# EAGLE board AtMEGA32u4-uSD-AddON (EAGLE 5.11)
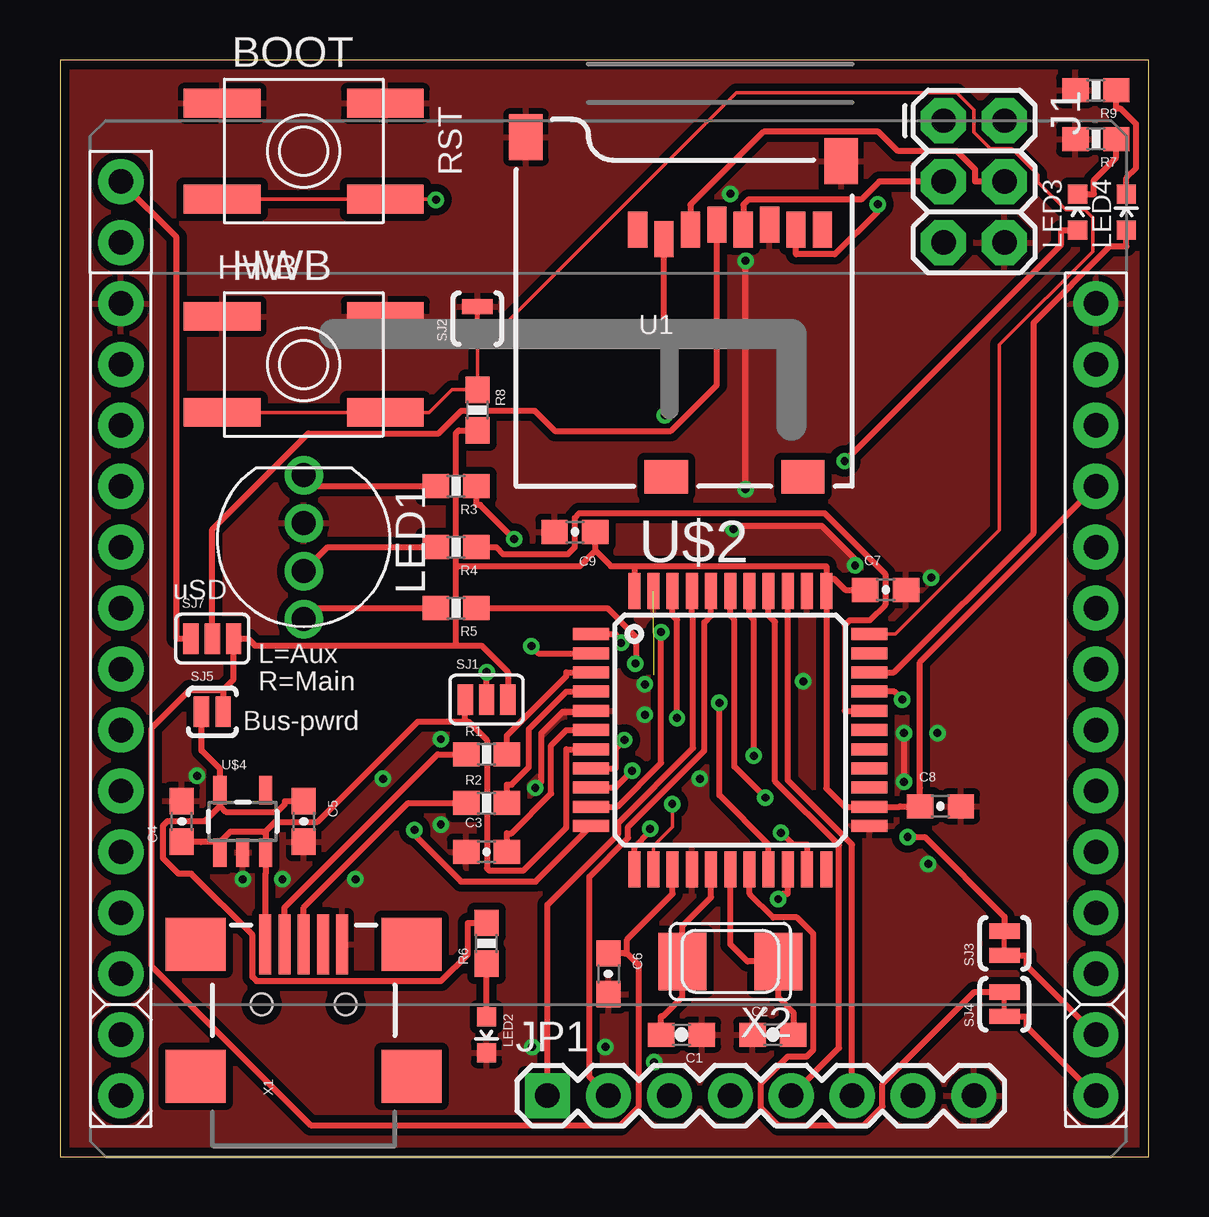
[diagram p0: board, top side]
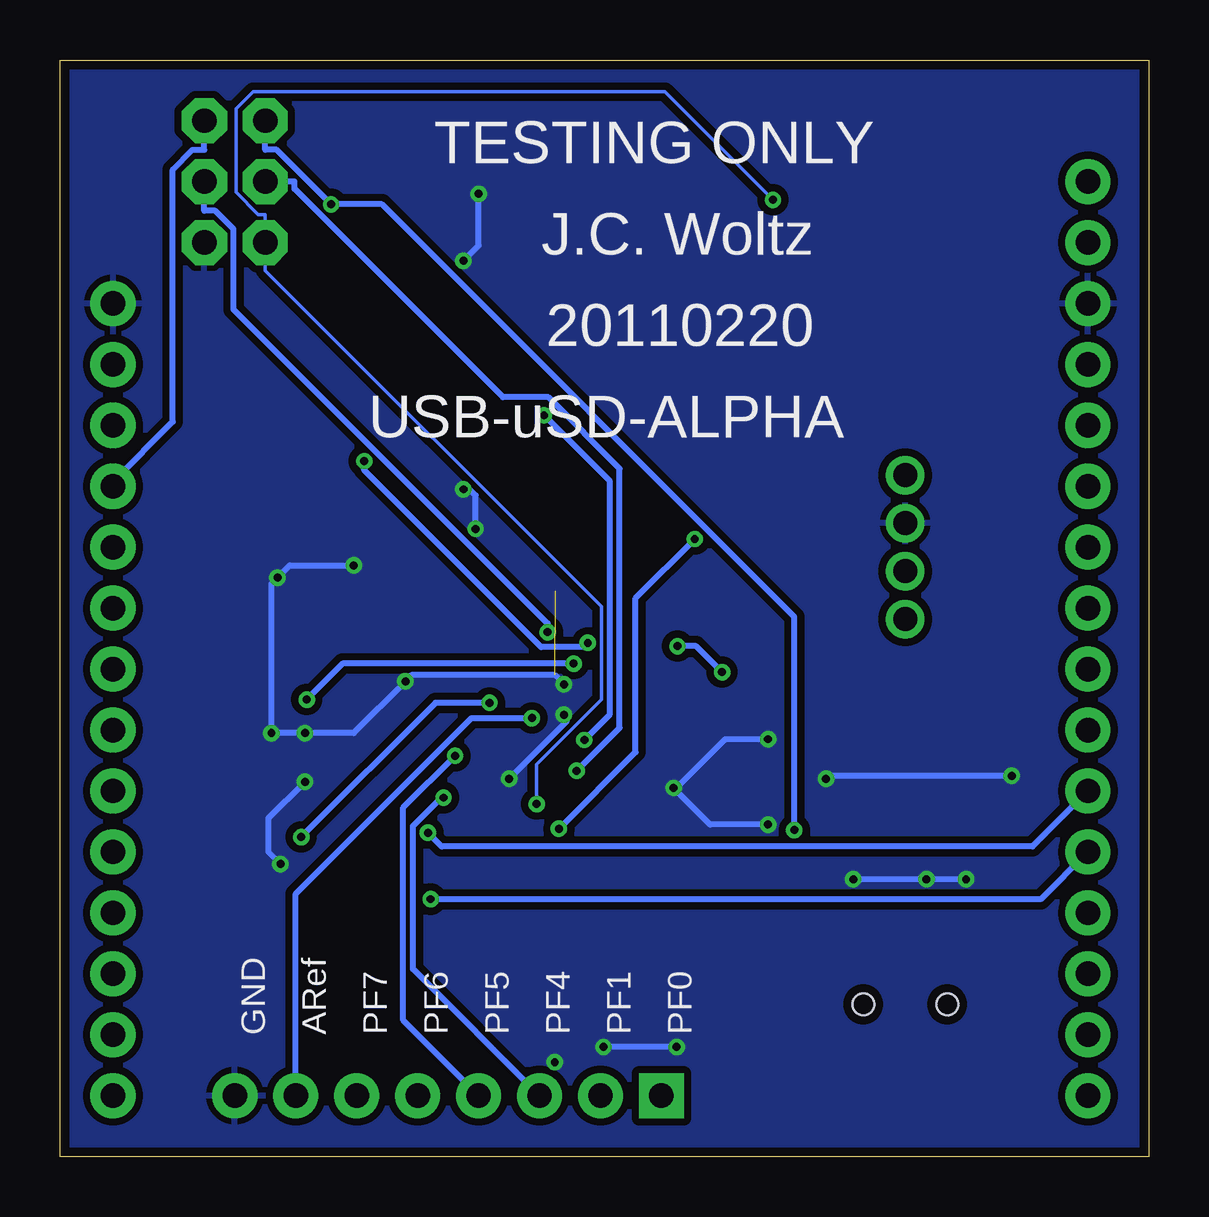
[diagram p1: board, bottom side, seen from below]

Size 45.39 x 45.71 mm. Coordinates in mm from the lower left corner, seen from the top.
Outline: 0,0 45.39,0 45.39,45.71 0,45.71 0,0
Copper layers (1*16): Top 0.0356mm / dielectric 1.5011mm / Bottom 0.0356mm
Design rules "LaenPCBOrder-JCModified": minimum track width 6mil, minimum drill 13mil, track to track 6mil, track to pad 6mil, pad to pad 6mil, via to via 6mil, smd to smd 6mil, copper to edge 15mil, drill to drill 6mil, minimum pad ring 12mil, minimum via ring 7mil, stop-mask expansion 4mil, vias tented up to drill 25mil, thermal gap 10mil
Net classes: 0 default: width 0.254 mm; 1 smallsignal: width 0.152 mm; 2 bigsignal: width 0.356 mm

## Footprints (pad centres in the part's own frame; a part is rotated, then mirrored left to right if it is on the bottom)
EVQ-Q2 = smd 3.2 x 1.2: A -3.4,-2; A' 3.4,-2; B -3.4,2; B' 3.4,2
0603-CAP = smd 1.1 x 1: 1 -0.85,0; 2 0.85,0
2X3 = drill 1.016 pad 1.88 octagon: 1 0,0; 2 0,2.54; 3 2.54,0; 4 2.54,2.54; 5 5.08,0; 6 5.08,2.54
1X08 = drill 1.016 pad 1.88 square: 1 0,0 | drill 1.016 pad 1.88 round: 2 2.54,0; 3 5.08,0; 4 7.62,0; 5 10.16,0; 6 12.7,0; 7 15.24,0; 8 17.78,0
LED-TRICOLOR-THROUGHHOLE = drill 1 round: BLU 1,0; GND -1,0; GRN 3,0; RED -3,0
LED-0603 = smd 0.8 x 0.8: A 0,-0.75; C 0,0.75
0603-RES = smd 1.1 x 1: 1 -0.85,0; 2 0.85,0
SJ_3_PASTE2&3 = smd 0.635 x 1.27: 1 -0.889,0; 2 0,0; 3 0.889,0
SJ_2S-TRACE = smd 0.635 x 1.27: 1 -0.508,0; 2 0.508,0
SJ_2S-NO = smd 0.635 x 1.27: 1 -0.45,0; 2 0.45,0
SJ_3_PASTE1&2 = smd 0.635 x 1.27: 1 -0.889,0; 2 0,0; 3 0.889,0
MICRO-SD-SOCKET-PP = smd 0.8 x 1.5: 1 -8.94,10.7; 2 -7.84,10.3; 3 -6.74,10.7; 4 -5.64,10.9; 5 -4.54,10.7; 6 -3.44,10.9; 7 -2.34,10.7; 8 -1.24,10.7 | smd 1.8 x 1.4: CD1 -2.05,0.4; CD2 -7.75,0.4 | smd 1.4 x 1.9: GND1 -13.6,14.55; GND3 -0.45,13.55
SYNSJ-STACK = drill 1.016 pad 1.88 round: G0 0,-7.62; G1 0,-10.16; G2 0,-12.7; G3 0,-15.24; G4 0,-17.78; G5 0,-20.32; G6 0,-22.86; G7 0,-25.4; G8 0,-27.94; G9 0,-30.48; G10 0,-33.02; G11 40.64,-33.02; G12 40.64,-30.48; G13 40.64,-27.94; G14 40.64,-25.4; G15 40.64,-22.86; G16 40.64,-20.32; G17 40.64,-17.78; G18 40.64,-15.24; GND 0,-5.08; GND1 40.64,-5.08; R1 0,0; R2 0,-2.54; R3 0,-35.56; R4 0,-38.1; R5 40.64,-38.1; R6 40.64,-35.56; RESERVED 40.64,-10.16; RESET 40.64,-7.62; VCC 40.64,-12.7
TQFP44 = smd 1.5 x 0.5: 1 -5.8,4; 2 -5.8,3.2; 3 -5.8,2.4; 4 -5.8,1.6; 5 -5.8,0.8; 6 -5.8,0; 7 -5.8,-0.8; 8 -5.8,-1.6; 9 -5.8,-2.4; 10 -5.8,-3.2; 11 -5.8,-4; 23 5.8,-4; 24 5.8,-3.2; 25 5.8,-2.4; 26 5.8,-1.6; 27 5.8,-0.8; 28 5.8,0; 29 5.8,0.8; 30 5.8,1.6; 31 5.8,2.4; 32 5.8,3.2; 33 5.8,4 | smd 0.5 x 1.5: 12 -4,-5.8; 13 -3.2,-5.8; 14 -2.4,-5.8; 15 -1.6,-5.8; 16 -0.8,-5.8; 17 0,-5.8; 18 0.8,-5.8; 19 1.6,-5.8; 20 2.4,-5.8; 21 3.2,-5.8; 22 4,-5.8; 34 4,5.8; 35 3.2,5.8; 36 2.4,5.8; 37 1.6,5.8; 38 0.8,5.8; 39 0,5.8; 40 -0.8,5.8; 41 -1.6,5.8; 42 -2.4,5.8; 43 -3.2,5.8; 44 -4,5.8
SOT23-5 = smd 0.55 x 1.2: 1 -0.95,-1.3; 2 0,-1.3; 3 0.95,-1.3; 4 0.95,1.3; 5 -0.95,1.3
USB-MINIB = smd 2.5 x 0.5: D+ 2.5,0; D- 2.5,0.8; GND 2.5,-1.6; ID 2.5,-0.8; VBUS 2.5,1.6 | smd 2.2 x 2.5: GND@1 -3,-4.5; GND@2 -3,4.5; GND@3 2.5,4.5; GND@4 2.5,-4.5 | hole 0.9: 0,1.75; 0,-1.75
NX5032 = smd 2 x 2.4: P$1 2,0; P$2 -2,0

## Placement (x,y rotation side)
BOOT  EVQQ2  [EVQ-Q2]  10.16,41.91 0 top
C1  22pF  [0603-CAP]  25.91,5.08 180 top
C2  22pF  [0603-CAP]  29.72,5.08 0 top
C3  1uF  [0603-CAP]  17.78,12.7 0 top
C4  1uF  [0603-CAP]  5.08,13.97 90 top
C5  1uF  [0603-CAP]  10.16,13.97 270 top
C6  1uF  [0603-CAP]  22.86,7.62 270 top
C7  1uF  [0603-CAP]  34.42,23.62 0 top
C8  1uF  [0603-CAP]  36.7,14.6 0 top
C9  1uF  [0603-CAP]  21.46,26.03 180 top
HWB  EVQQ2  [EVQ-Q2]  10.16,33.02 0 top
J1  AVR_SPI_PRG_6PTH  [2X3]  36.83,43.18 270 top
JP1  [1X08]  20.32,2.54 0 top
LED1  rgb  [LED-TRICOLOR-THROUGHHOLE]  10.16,25.4 270 top
LED2  GREEN  [LED-0603]  17.78,5.08 180 top
LED3  RED  [LED-0603]  42.42,39.37 0 top
LED4  RED  [LED-0603]  44.45,39.37 0 top
R1  22  [0603-RES]  17.78,16.76 0 top
R2  22  [0603-RES]  17.78,14.73 0 top
R3  220  [0603-RES]  16.51,27.94 180 top
R4  220  [0603-RES]  16.51,25.4 180 top
R5  220  [0603-RES]  16.51,22.86 180 top
R6  1K  [0603-RES]  17.78,8.89 90 top
R7  1K  [0603-RES]  43.18,42.42 180 top
R8  10K  [0603-RES]  17.4,31.12 270 top
R9  1K  [0603-RES]  43.18,44.45 180 top
SJ1  [SJ_3_PASTE2&3]  17.78,19.05 0 top
SJ2  HWB  [SJ_2S-TRACE]  17.4,34.93 90 top
SJ3  SOLDERJUMPERTRACE  [SJ_2S-TRACE]  39.37,8.89 90 top
SJ4  SOLDERJUMPERTRACE  [SJ_2S-TRACE]  39.37,6.35 90 top
SJ5  SOLDERJUMPERNO  [SJ_2S-NO]  6.35,18.54 0 top
SJ7  [SJ_3_PASTE1&2]  6.35,21.59 0 top
U1  USD-SOCKETNEW  [MICRO-SD-SOCKET-PP]  33.02,27.94 0 top
U$1  SYNAPSE-SJ-STCKINGD30-1600  [SYNSJ-STACK]  2.54,40.64 0 top
U$2  ATMEGA32U4-AU  [TQFP44]  27.94,17.78 0 top
U$4  MCP1802  [SOT23-5]  7.62,13.97 0 top
X1  USBSMD  [USB-MINIB]  10.16,6.35 90 top
X2  NX5032GA  [NX5032]  27.94,8.13 180 top

## Library data of the parts
BOOT HWB = adaprog
C1 C2 J1 JP1 LED1 SJ1-SJ5 SJ7 = SparkFun
C3-C9 LED2-LED4 R1-R9 U$1 U$4 X1 = 0_jc-custom
U1 = 0_jc-modified
U$2 X2 = adafruit

## Nets
AREF-7: JP1.7 U$2.42
GND: BOOT.B BOOT.B' C1.1 C2.1 C3.1 C4.2 C5.2 C6.2 C7.2 C8.2 C9.2 HWB.B HWB.B' J1.6 JP1.8 LED1.GND LED2.C R7.2 R9.2 SJ2.2 U1.6 U1.GND1 U1.GND3 U$1.GND U$1.GND1 U$2.5 U$2.15 U$2.23 U$2.35 U$2.43 U$4.2 X1.GND
HWB [smallsignal]: HWB.A HWB.A' R8.1 SJ2.1 U$2.33
MISO: J1.1 U1.7 U$2.11
MOSI: J1.4 U1.3 U$2.10
MVOUT: C5.1 R6.2 SJ5.1 U$4.5
N$3: SJ7.2 U1.4
N$4: C3.2 U$2.6
N$6: LED1.RED R3.2
N$7: LED1.BLU R4.2
N$8: LED2.A R6.1
N$9: LED4.C R9.1
N$10: LED3.C R7.1
N$11: SJ3.1 U$1.R6
N$12: LED1.GRN R5.2
N$13: SJ4.1 U$1.R5
N$38: U1.CD1
N$40: U1.CD2
PB4: U$2.28
PB5-BLU: R4.1 U$2.29
PB6-GRN: R5.1 U$2.30
PB7-RED: R3.1 U$2.12
PC6-LED4: LED4.A U$2.31
PC7: U$2.32
PD4: U$2.25
PD5: U$2.22
PD6: U$2.26
PD7: U$2.27
PE6-LED3: LED3.A U$2.1
PF0-1: JP1.1 U$2.41
PF1-2: JP1.2 U$2.40
PF4-3: JP1.3 U$2.39
PF5-4: JP1.4 U$2.38
PF6-5: JP1.5 U$2.37
PF7-6: JP1.6 U$2.36
RESET: U$1.RESET
RST [smallsignal]: BOOT.A BOOT.A' J1.5 U$2.13
RX1: U$1.G7 U$2.21
SCK: J1.3 U1.5 U$2.9
SCL: SJ4.2 U$2.18
SD_CS: U1.2 U$2.8
SDA: SJ3.2 U$2.19
TX1: U$1.G8 U$2.20
UD+: R2.2 U$2.4
UD-: R1.2 U$2.3
UDM: R1.1 X1.D-
UDP: R2.1 X1.D+
UVCC: SJ1.2 U$2.2
VBUS: C4.1 SJ1.1 U$2.7 U$4.1 U$4.3 X1.VBUS
VCC3: C6.1 C7.1 C8.1 C9.1 J1.2 R8.2 SJ1.3 SJ5.2 SJ7.3 U$1.VCC U$2.14 U$2.24 U$2.34 U$2.44
VCC3A: SJ7.1 U$1.R1
XTAL1: C2.2 U$2.17 X2.P$2
XTAL2: C1.2 U$2.16 X2.P$1

## Tracks (layer width: path | path; a pad name or v marks a point on that pad's centre or on a via)
AREF-7  (via drill 0.33 pad 0.69)
  Top 0.254: U$2.42 25.54,22.55 25.72,22.37 v25.72,18.27
  Bottom 0.254: v25.72,18.27 28.24,18.27 35.56,10.96 JP1.7
GND  (via drill 0.33)  (1 unrouted)
  Top 0.254: v19.81,15.37 20.07,15.62 20.07,17.65 20.95,18.54 22.1,18.54 U$2.5 | v35.18,17.65 v35.18,15.62 | v33.15,24.64 33.15,24.89 31.75,26.29 28.07,26.29 v28.07,26.16 | v28.57,27.81 v28.57,37.34
  Bottom 0.254: v15.88,13.84 18.29,13.84 v19.81,15.37 19.68,15.37 17.65,17.4 v15.88,17.4 | v7.62,11.56 v9.27,11.56 v12.32,11.56 | v19.68,4.57 v22.73,4.57 | v13.46,15.75 13.33,15.87 v5.72,15.87 | v24.38,18.41 24.26,18.29 24.26,18.16 v26.67,15.75 | v24.38,19.69 24.76,20.07 30.73,20.07 v30.99,19.81 33.15,17.65 v35.18,17.65 v36.58,17.65 36.58,23.88 v36.32,24.13 35.81,24.64 v33.15,24.64 | v35.18,15.62 36.7,14.1 36.7,12.7 v36.2,12.19 | v28.07,26.16 28.07,27.56 28.32,27.81 v28.57,27.81 | v28.57,37.34 27.94,37.97 v27.94,40.13
  other vias: 24.76,3.94
  pour Bottom (isolate 0.305): 0,45.72 45.72,45.72 45.72,0 0,0
  pour Top (isolate 0.305): 0,45.72 45.72,45.72 45.72,0 0,0
HWB
  Top 0.152: U$2.33 34.83,21.78 39.16,26.12 39.16,33.84 43.05,37.72 43.05,39.13 42.71,39.47 41.93,39.47 40.77,40.62 40.77,40.92 39.68,42.01 38.79,42.01 38.1,42.7 38.1,43.63 37.38,44.35 28.2,44.35 18.26,34.42 SJ2.1 17.4,32.74 R8.1 16.33,31.97 15.39,31.02 HWB.A' HWB.A
MISO  (via drill 0.33 pad 0.69)
  Top 0.254: v14.78,13.61 14.78,13.4 16.71,11.46 19.82,11.46 U$2.11 | v34.09,39.69 34.09,39.4 32.3,37.61 30.68,37.61 U1.7
  Bottom 0.254: v14.78,13.61 14.78,22.5 31.97,39.69 v34.09,39.69 36.35,41.96 36.83,41.96 J1.1
MOSI  (via drill 0.33 pad 0.69)
  Top 0.254: v25.06,21.86 25.06,16.41 23.23,14.58 23.17,14.58 U$2.10 | U1.3 26.28,39.67 29.33,42.72 34.12,42.72 34.93,41.91 37.39,41.91 38.15,41.15 38.15,40.64 J1.4
  Bottom 0.254: v25.06,21.86 25.06,22.22 38.15,35.31 38.15,38.66 38.91,39.42 39.37,39.42 J1.4
MVOUT
  Top 0.254: 6.67,14.61 6.05,13.99 4.49,13.99 4.3,13.8 4.3,12.44 4.94,11.79 5.48,11.79 8.03,9.24 8.03,7.48 8.19,7.32 15.88,7.32 17,8.44 17,9.74 R6.2 | 6.67,14.61 6.91,14.37 9.04,14.37 9.38,14.71 9.38,14.82 C5.1 | SJ5.1 5.9,16.92 6.67,16.15 U$4.5 6.67,14.83 6.67,14.61
N$3
  Top 0.254: U1.4 27.38,32.16 25.47,30.25 20.63,30.25 19.78,31.09 16.74,31.09 15.79,30.14 10.35,30.14 6.35,26.14 SJ7.2
N$4
  Top 0.254: C3.2 18.63,13.48 18.82,13.48 20.47,15.13 20.47,17.14 21.11,17.78 U$2.6
N$6
  Top 0.254: R3.2 10.62,27.94 LED1.RED
N$7
  Top 0.254: R4.2 11.16,25.4 LED1.BLU
N$8
  Top 0.254: LED2.A R6.1
N$9
  Top 0.254: LED4.C 44.45,40.8 44.86,41.21 44.86,43.04 44.23,43.67 44.03,43.67 R9.1
N$10
  Top 0.254: LED3.C 43.1,40.12 43.1,40.71 44.03,41.64 R7.1
N$11
  Top 0.254: SJ3.1 40.28,8.38 40.28,7.98 U$1.R6
N$12
  Top 0.254: R5.2 10.62,22.86 LED1.GRN
N$13
  Top 0.254: SJ4.1 40.28,5.84 40.28,5.44 U$1.R5
PB5-BLU
  Top 0.254: R4.1 18.19,25.4 18.47,25.12 21.18,25.12 21.46,25.4 21.46,26.63 21.64,26.81 31.87,26.81 34.4,24.29 34.4,23 33.75,22.35 32.91,22.35 32.71,22.15 32.71,18.58 U$2.29
PB6-GRN  (via drill 0.33 pad 0.69)
  Top 0.254: v23.98,20.55 24.01,20.58 24.01,21.67 22.82,22.86 R5.1 | U$2.30 34.78,19.38 v35.11,19.05
  Bottom 0.254: v35.11,19.05 33.61,20.55 v23.98,20.55
PB7-RED  (via drill 0.33 pad 0.69)
  Top 0.254: R3.1 17.36,27.16 17.51,27.16 v18.93,25.74 | U$2.12 23.94,12.91 24.6,13.56 v24.6,13.67
  Bottom 0.254: v24.6,13.67 21.4,16.87 21.4,23.27 v18.93,25.74
PC6-LED4
  Top 0.254: LED4.A 44.45,37.94 43.77,37.94 40.59,34.76 40.59,26 34.77,20.18 U$2.31
PE6-LED3  (via drill 0.33 pad 0.69)
  Top 0.254: U$2.1 23.17,21.78 23.17,21.63 v23.39,21.41 | LED3.A 41.74,38.62 41.74,38.02 v32.71,28.99
  Bottom 0.254: v23.39,21.41 23.56,21.24 25.34,21.24 32.71,28.61 v32.71,28.99
PF0-1
  Top 0.254: JP1.1 20.32,3.76 20.32,10.49 23.28,13.45 23.28,13.92 26.39,17.03 26.39,22.5 26.34,22.55 U$2.41
PF1-2
  Top 0.254: JP1.2 22.07,3.33 22.07,11.67 23.68,13.28 23.68,13.75 26.86,16.92 26.86,22.27 27.14,22.55 U$2.40
PF4-3  (via drill 0.33 pad 0.69)
  Top 0.254: v29.4,14.96 28.11,16.26 28.11,22.38 27.94,22.55 U$2.39
  Bottom 0.254: JP1.3 30.68,7.81 30.68,13.78 29.49,14.96 v29.4,14.96
PF5-4  (via drill 0.33 pad 0.69)
  Top 0.254: U$2.38 28.74,22.55 28.92,22.37 v28.92,16.71
  Bottom 0.254: JP1.4 31.08,5.68 31.08,14.55 v28.92,16.71
PF6-5
  Top 0.254: U$2.37 29.54,22.55 29.81,22.28 29.81,15.65 32.47,12.98 32.47,4.53 JP1.5
PF7-6
  Top 0.254: U$2.36 30.34,22.55 30.34,15.69 33.02,13.01 JP1.6
RST  (via drill 0.33 pad 0.69)
  Top 0.152: v15.67,39.88 15.42,39.88 15.39,39.91 BOOT.A' BOOT.A | U$2.13 24.74,12.96 25.52,13.74 v25.52,14.69
  Bottom 0.152: v15.67,39.88 20.17,44.38 37.34,44.38 38.05,43.67 38.05,40.19 37.12,39.27 36.83,39.27 J1.5 36.83,37.52 36.83,36.93 22.82,22.92 22.82,19.05 25.52,16.34 v25.52,14.69
RX1  (via drill 0.33 pad 0.69)
  Top 0.254: U$2.21 31.14,13.01 30.54,13.01 v30.05,13.5
  Bottom 0.254: v30.05,13.5 29.48,12.92 4.85,12.92 U$1.G7
SCK  (via drill 0.33 pad 0.69)
  Top 0.254: U$2.9 23.17,15.38 23.17,15.4 v23.85,16.08 | U1.5 28.48,39.16 28.48,39.67 28.7,39.89 33.4,39.89 34.15,40.64 35.61,40.64 J1.3
  Bottom 0.254: v23.85,16.08 22.06,17.88 22.06,28.67 25.03,31.65 26.93,31.65 35.61,40.34 35.61,40.64 J1.3
SCL
  Top 0.254: U$2.18 28.74,10.95 29.73,9.96 30.72,9.96 31.4,9.29 31.4,4.44 31.13,4.17 30.33,4.17 29.21,3.05 29.21,2.05 29.95,1.31 33.52,1.31 34.29,2.08 34.29,3.03 38.12,6.86 SJ4.2
SD_CS  (via drill 0.33 pad 0.69)
  Top 0.254: U$2.8 23.17,16.18 23.17,17.01 v23.53,17.37 | U1.2 25.18,30.93 v25.21,30.9
  Bottom 0.254: v25.21,30.9 22.46,28.15 22.46,18.43 v23.53,17.37
SDA  (via drill 0.33 pad 0.69)
  Top 0.254: U$2.19 29.54,13.01 27.48,15.06 v27.48,18.91 | SJ3.2 39.37,9.99 36.05,13.32 v35.33,13.32
  Bottom 0.254: v27.48,18.91 29.74,18.91 v35.33,13.32
TX1  (via drill 0.33 pad 0.69)
  Top 0.254: U$2.20 30.34,10.95 30.16,10.95 v29.94,10.73
  Bottom 0.254: v29.94,10.73 4.51,10.73 U$1.G8
UD+
  Top 0.254: R2.2 18.63,15.51 18.82,15.51 19.55,16.23 19.55,17.82 21.11,19.38 U$2.4
UD-
  Top 0.254: R1.2 18.63,17.54 21.11,20.02 21.11,20.18 U$2.3
UDM
  Top 0.254: X1.D- 9.36,10.38 15.74,16.76 R1.1
UDP
  Top 0.254: X1.D+ 10.16,10.38 14.51,14.73 R2.1
UVCC  (via drill 0.33 pad 0.69)
  Top 0.254: v17.79,20.19 v17.78,20.18 SJ1.2 | U$2.2 19.95,20.98 v19.65,21.28
  Bottom 0.254: v19.65,21.28 18.87,21.28 v17.79,20.19
VBUS
  Top 0.254: 16.89,18.13 17.03,18.13 17.8,17.36 17.8,12.01 17.89,11.92 19.32,11.92 21.11,13.71 21.11,16.98 U$2.7 | 8.57,13.55 7.11,13.55 6.67,13.11 | 8.57,13.55 8.57,13.45 U$4.3 8.57,11.79 8.56,11.78 X1.VBUS | 8.57,13.55 8.97,13.95 10.74,13.95 14.92,18.13 16.89,18.13 | 16.89,18.13 SJ1.1 | C4.1 5.86,13.12 5.87,13.11 6.67,13.11 | U$4.1 6.67,13.11
VCC3
  Top 0.254: C7.1 32.74,23.62 32.27,24.09 31.94,24.09 | 31.94,24.09 31.94,24.61 23.94,24.61 | 31.94,24.09 U$2.34 31.94,22.55 31.94,15.35 32.71,14.58 U$2.24 35,14.58 35.02,14.6 35.65,14.6 C8.1 35.85,14.99 35.85,15.38 35.85,20.61 U$1.VCC | 22.31,25.26 22.96,24.61 23.94,24.61 | 16.51,24.62 21.67,24.62 22.31,25.26 | 16.51,24.62 16.51,30.16 16.62,30.27 R8.2 | 16.51,21.3 16.51,24.62 | 22.31,25.26 C9.1 | 23.94,24.61 U$2.44 | 16.51,21.3 8.13,21.3 7.84,21.59 SJ7.3 7.24,20.68 | SJ1.3 18.67,20.19 17.56,21.3 16.51,21.3 | 6.8,19.46 7.24,19.9 7.24,20.68 | 7.24,20.68 | 23.64,8.47 24.13,7.98 24.13,2.08 23.36,1.31 10.45,1.31 3.83,7.94 3.83,17.87 5.42,19.46 6.8,19.46 | 23.64,8.47 23.54,8.47 C6.1 | U$2.14 25.54,10.95 23.64,9.05 23.64,8.47 | 6.8,19.46 SJ5.2
  Bottom 0.254: J1.2 39.37,41.96 39.88,41.96 40.69,41.15 40.69,30.63 43.18,28.14 U$1.VCC
VCC3A
  Top 0.254: SJ7.1 4.86,21.59 4.86,38.32 U$1.R1
XTAL1
  Top 0.254: U$2.17 27.94,8.85 28.66,8.13 X2.P$2 29.94,6.65 30.57,6.02 C2.2
XTAL2
  Top 0.254: U$2.16 27.14,10.81 25.94,9.61 X2.P$1 25.94,6.65 25.15,5.86 25.06,5.86 C1.2

## Text on the board
tPlace: RST | HWB | uSD | L=Aux | R=Main | Bus-pwrd
bPlace: TESTING ONLY | J.C. Woltz | 20110220 | USB-uSD-ALPHA | PF0 | PF1 | PF4 | PF5 | PF6 | PF7 | ARef | GND